# Altium PCB MS-003.24T003灯带驱动板PCB图 V1.0.PcbDoc
Units mil, origin at the board's own origin, x right, y up, seen from the top; angles counter-clockwise.
Board outline 3453.19 x 1363.84 mil, 2 copper layers (Top Layer, Bottom Layer), stack 61.756 mil thick; 42 components, 24 nets, 112 pads, 180 vias.
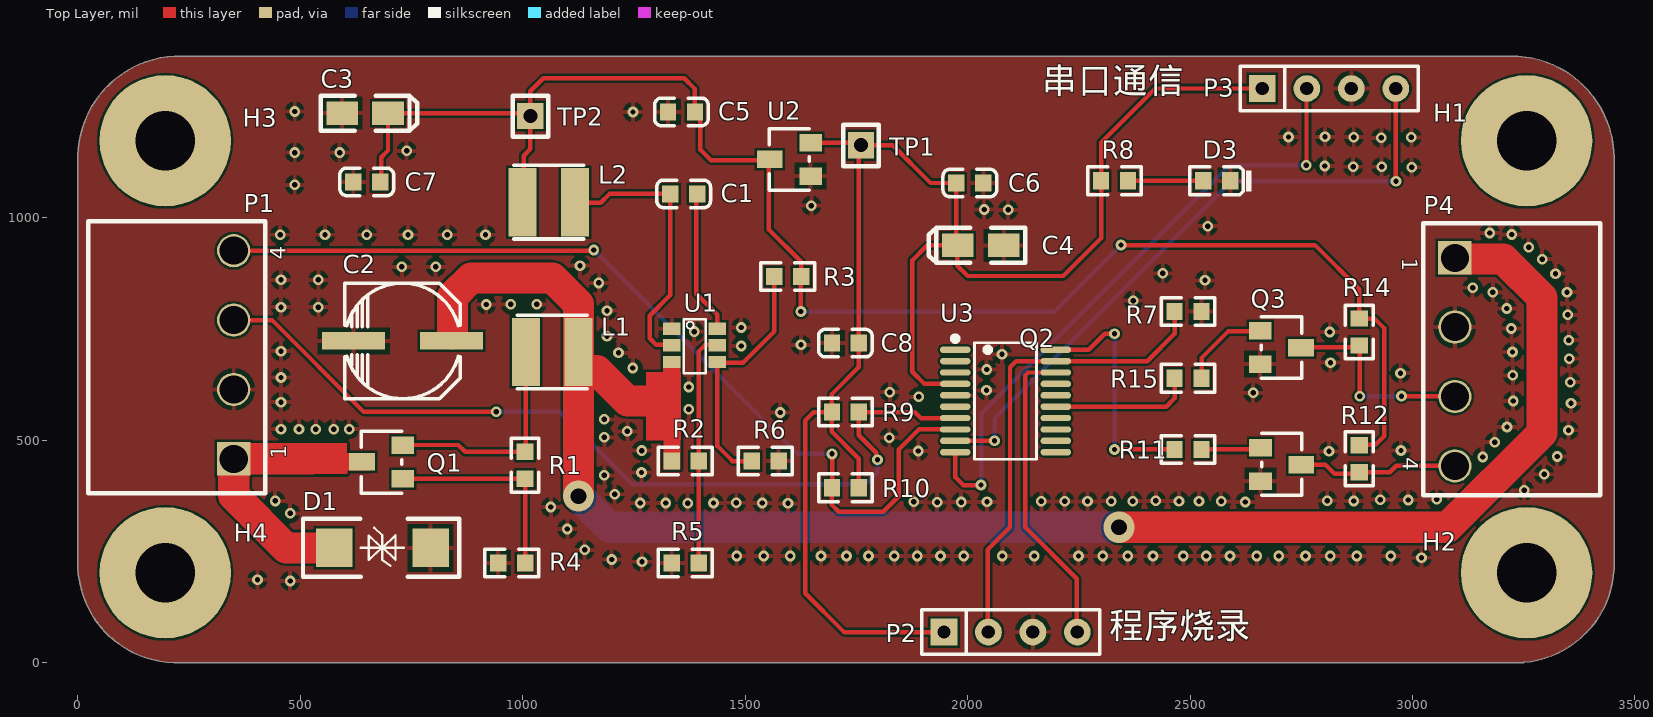
[diagram p0: Top Layer view]
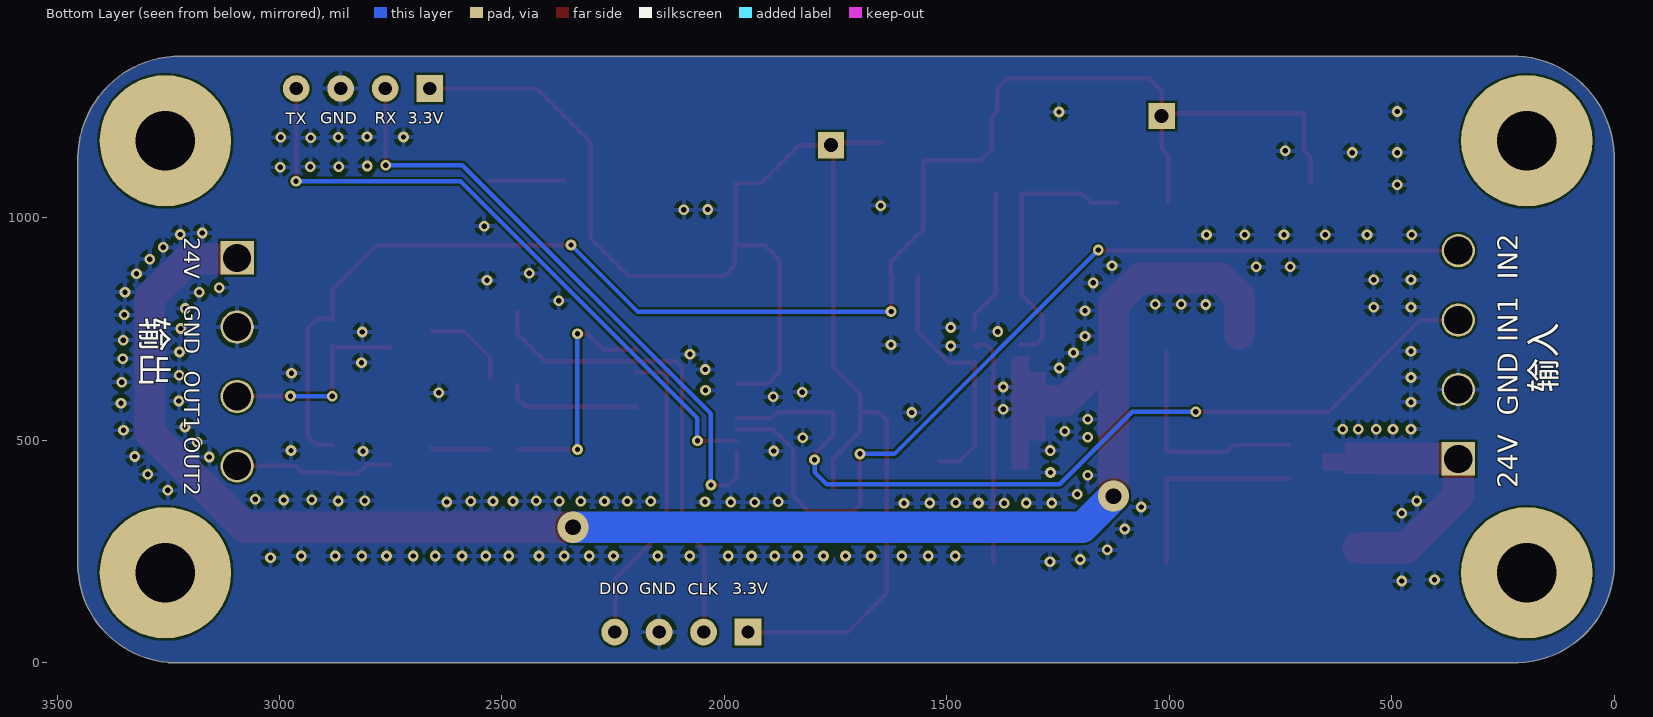
[diagram p1: Bottom Layer view, seen from below]
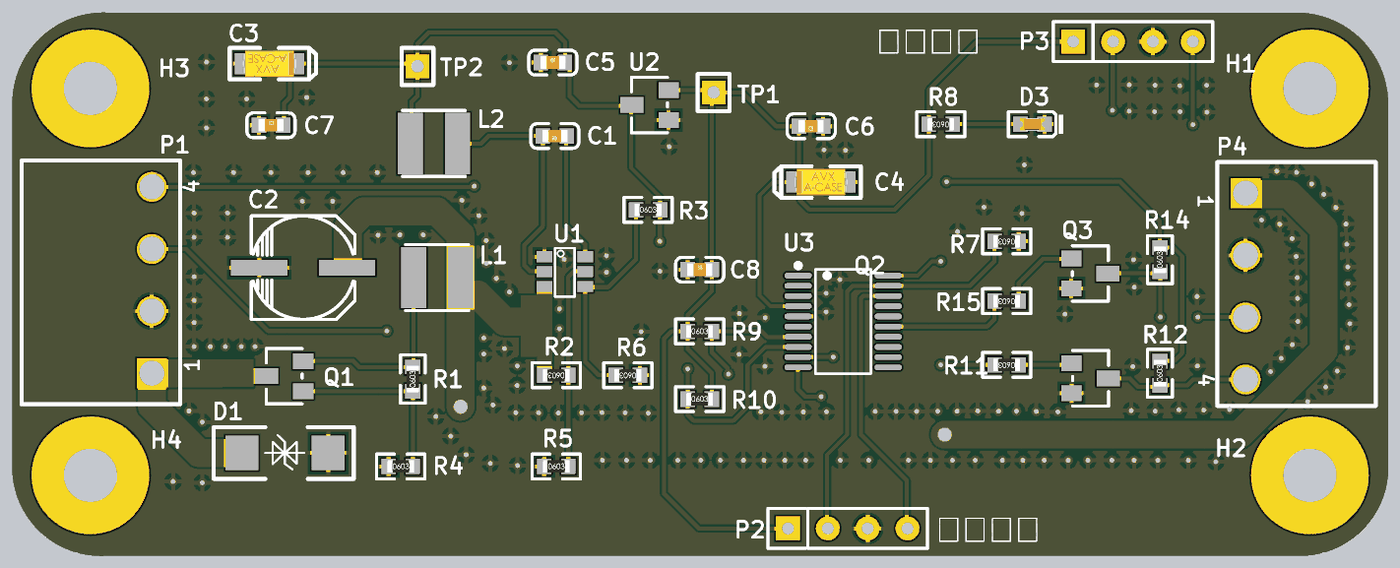
[diagram p2: 3D render of the assembled board from above, using the file's embedded part models]

## Layer stack, top to bottom
Top Solder: solder mask 1, SM-001, Dk 4
Top Layer: signal copper 1.378
Dielectric 1: core 59, Core-043, Dk 4.3
Bottom Layer: signal copper 1.378
Bottom Solder: solder mask 1, SM-001, Dk 4

## Board outline
0.06,212.91 ccw(c222.42,222.23) 231.74,-0.14 231.74,0.11 3250.21,0.11 3250.21,0.66 ccw(c3232.03,221.37) 3453.24,210.9 3453.24,1135.54 3453.18,1135.54 ccw(c3223.21,1133.58) 3221.26,1363.54 3221.26,1363.56 233.09,1363.56 233.09,1363.61 ccw(c228.45,1135.27) 0.11,1139.91

## Design rules (kind name [scope] priority, off if disabled: settings)
Clearance [All] p1: gap=5 ignorepadtopadclearanceinfootprint=FALSE
HoleSize [All] p1: absolutevalues=TRUE maxlimit=150 minlimit=1 maxpercent=80.000 minpercent=20.000
HoleToHoleClearance [All] p1: gap=5 allowstackedmicrovias=TRUE
MinimumSolderMaskSliver [All] p1: minsoldermaskwidth=1
PolygonConnect [All] p1: connectstyle=Relief reliefconductorwidth=10 reliefentries=4 polygonreliefangle="90 Angle" airgapwidth=10
RoutingVias [All] p1: holewidth=12 width=24 viastyle="Through Hole" minholewidth=12 minwidth=24 maxholewidth=80 maxwidth=120
SilkToSilkClearance [All] p1: silktosilkclearance=1
SilkToSolderMaskClearance [IsPad] p1: minsilkscreentomaskgap=1 clearancetoexposedcopper=TRUE
SolderMaskExpansion [All] p1: expansion=4 istentingtop=FALSE
Width [All] p1: maxlimit=100 minlimit=10 preferedwidth=10
25 further rules are at their usual default settings.

## Components (designator, comment, footprint, x,y, rotation, side; value= is the part's Value field where it differs from the comment)
C1 "0.1uF" 0603_C 1361.75,1053.78 r180 top
C2 "100uF/35V/20%" "CAP 6.6×6.6" 730.07,723.27 r0 top
C3 "10uF/16V" CASE-A_3216 645.49,1235.33 r0 top
C4 "10uF/16V" CASE-A_3216 2029.75,938.08 r180 top
C5 "0.1uF" 0603_C 1356.75,1238.19 r0 top
C6 "0.1uF" 0603_C 2004.99,1078.27 r180 top
C7 "0.1uF" 0603_C 649.27,1080.73 r0 top
C8 "0.1uF" 0603_C 1725.3,718.27 r0 top
D1 "SMBJ26CA" SMB 792.97,258.11 r180 top
D3 "绿灯 0603" 0603_LED_S1 2560.3,1083.27 r180 top
H1 "=Value" THC7R5D3R4-M3-PTH#1 3254.68,1173.15 r0 top
H2 "=Value" THC7R5D3R4-M3-PTH#2 3256.68,202.05 r0 top
H3 "=Value" THC7R5D3R4-M3-PTH#3 200.24,1173.15 r0 top
H4 "=Value" THC7R5D3R4-M3-PTH#2 196.24,202.05 r0 top
L1 "10uH/20%/1.5A" IND-SMD_L4.0-W4.0_FNR40XXS 1066.24,698.27 r0 top value=15uH
L2 "10uH/20%/1.5A" IND-SMD_L4.0-W4.0_FNR40XXS 1058.3,1035.1 r180 top value=15uH
P1 "Header_3.96mm" "Header 4-3.96mm" 350.3,692.22 r90 top value=W8010411120AB
P2 "Header_2.54mm" "Header 4-2.54mm" 1946.81,68.76 r0 top value=W8010411120AB
P3 "Header_2.54mm" "Header 4-2.54mm" 2662.71,1290.68 r0 top value=W8010411120AB
P4 "Header_3.96mm" "Header 4-3.96mm" 3095.3,676.31 r270 top value=W8010411120AB
Q1 "CJ2301" SOT-23_3 730.3,413.27 r90 top
Q2 "S8050" SOT-23_3 2658.49,483.27 r270 top
Q3 "S8050" SOT-23_3 2657.76,746.07 r270 top
R1 "51k" 0603_R 1005.3,443.58 r90 top
R2 "51k" 0603_R 1365.3,453.27 r180 top
R3 "51k" 0603_R 1595.62,868.27 r0 top
R4 "51k" 0603_R 974.99,224.3 r0 top
R5 "10k" 0603_R 1365.3,224.3 r0 top
R6 "6.8k" 0603_R 1544.99,453.27 r180 top
R7 "10k" 0603_R 2495.62,789.27 r180 top
R8 "10k" 0603_R 2330.3,1083.27 r180 top
R9 "4.7k" 0603_R 1725.3,563.27 r0 top
R10 "4.7k" 0603_R 1725.3,393.27 r0 top
R11 "1k" 0603_R 2495.62,479.27 r180 top
R12 "200Ω" 0603_R 2880.3,458.27 r90 top
R14 "200Ω" 0603_R 2880.3,743.27 r90 top
R15 "1k" 0603_R 2495.62,639.27 r180 top
TP1 "3.3V" TP-2.0 1760.3,1163.27 r0 top
TP2 "5V" TP-2.0 1017.07,1228.78 r0 top
U1 "TPS54202DDCR" SOT-23_6 1335.3,750.67 r270 top
U2 "ME6211A33M3G" SOT-23_3 1647.07,1093.78 r90 top
U3 "STM32G030F6P6" TSSOP-20_L6.5-W4.4-P0.65-LS6.4-BL 2085.3,588.27 r270 top

## Footprints (in the part's own frame and the unit in brackets; to place one, negate y for a bottom-side part, rotate by r counter-clockwise, add the part's x,y. Pads: shape width x height; smd on the part's side, far side on the other; paste and mask are expansions set on the pad)
0603_C [mm]
  rect 0.93x0.98 smd: 1(-0.77,0) 2(0.77,0)
  silkscreen extent -1.53,-0.79 1.54,0.79, body extent -0.8,-0.4 0.8,0.4, height 0.3
0603_LED_S1 [mm]
  rect 0.93x0.98 smd: A(0.77,0) K(-0.77,0)
  silkscreen extent -1.98,-0.79 1.54,0.79, body extent -0.8,-0.4 0.8,0.4, height 0.6
0603_R [mm]
  rect 0.93x0.98 smd: 1(-0.77,0) 2(0.77,0)
  silkscreen extent -1.53,-0.79 1.54,0.79, body extent -0.85,-0.4 0.85,0.4, height 0.56
"CAP 6.6×6.6" [mm]
  rect 3.6x1 smd: 1(-2.8,0) 2(2.8,0)
  silkscreen extent -3.3,-3.3 3.3,3.3
CASE-A_3216 [mm]
  rect 1.8x1.35 smd: 1(1.31,0) 2(-1.31,0)
  silkscreen extent -2.54,-1 2.97,1, body extent -1.7,-0.84 1.7,0.84, height 1.71
"Header 4-2.54mm" [mil]
  rect 60x60 hole 30: 1(0,0)
  round 60 hole 30: 2(100,0) 3(200,0) 4(300,0)
  silkscreen extent -50,-50 350,50
"Header 4-3.96mm" [mm]
  rect 1.9x1.9 hole 1.6: 1(-5.94,0)
  round 1.9 hole 1.6: 2(-1.98,0) 3(1.98,0) 4(5.94,0)
  silkscreen extent -7.92,-1.8 7.62,8.3
IND-SMD_L4.0-W4.0_FNR40XXS [mm]
  rect 1.6x3.9 smd: 1(-1.5,0) 2(1.5,0)
  silkscreen extent -2,-2.1 2,2.1
SMB [mm]
  rect 2.1x2.2 smd: A(0,0) K(5.5,0)
  silkscreen extent -1.63,-1.65 7.29,1.65
SOT-23_3 [mm]
  rect 1x1.29 smd: 1(0,0) 2(1.905,0)
  rect 1x1.47 smd: 3(0.965,2.332)
  silkscreen extent -0.81,0.07 2.72,2.36
SOT-23_6 [mm]
  rect 0.7x1 smd: 1(0,0) 2(0.95,0) 3(1.9,0) 4(1.9,2.6) 5(0.95,2.6) 6(0,2.6)
  silkscreen extent -0.55,0.69 2.55,1.93
THC7R5D3R4-M3-PTH#1 [mm]
  round 7.5 hole 3.4: 1(0.051,0)
THC7R5D3R4-M3-PTH#2 [mm]
  round 7.5 hole 3.4: 1(0,0)
THC7R5D3R4-M3-PTH#3 [mm]
  round 7.5 hole 3.4: 1(-0.102,0)
TP-2.0 [mm]
  rect 1.5x1.5 hole 0.8: 1(0,0)
  silkscreen extent -1.02,-1.19 1.02,1.17
TSSOP-20_L6.5-W4.4-P0.65-LS6.4-BL [mil]
  oval 14.33x68.58 smd: 1(-115.16,-113.03) 2(-89.57,-113.03) 3(-63.98,-113.03) 4(-38.39,-113.03) 5(-12.79,-113.03) 6(12.8,-113.03) 7(38.39,-113.03) 8(63.98,-113.03) 9(89.57,-113.03) 10(115.16,-113.03) 11(115.16,113.03) 12(89.57,113.03) 13(63.98,113.03) 14(38.39,113.03) 15(12.8,113.03) 16(-12.79,113.03) 17(-38.39,113.03) 18(-63.98,113.03) 19(-89.57,113.03) 20(-115.16,113.03)
  silkscreen extent -146,-119 131,70

## Part data
C1 C7 C8: library part C_2
C2: library part "Cap Pol", "Capacitor-P", LatestRevisionDate=29-May-2009, LatestRevisionNote="IPC-7351 Footprint Added.", PackageDescription="Chip Capacitor", PackageReference=C0805, Published=8-Jun-2000, Publisher="Altium Limited"
C3 C4: library part CAP_ELECTROL
C5 C6: library part Cap, "Capacitor", LatestRevisionDate=17-Jul-2002, LatestRevisionNote="Re-released for DXP Platform.", PackageDescription="Radial Cap, Thru-Hole; 2 Leads; 0.3 in Pin Spacing", PackageReference=RAD-0.3, Published=8-Jun-2000, Publisher="Altium Limited"
D1: library part SSVT
D3: library part "0603 绿灯", "发光二极管", PACKAGE=0603, SuppliersPartNumber=C72043, ComponentLink1Description=供应商链接, ComponentLink1URL=http://www.szlcsc.com/product/details_73152.html, Supplier=LC
H1 H2 H3 H4: library part M4-PTH, Allow Altenative Part=Y, Approved=YES, Categories=符号, Category=SCREW, Modify time=42779, Part Number=M4-PTH, serial number=18, Supplier 1=CRD
L1 L2: library part 101LP-00033OD.01, "SMD,电感值10uH,精度±20%,额定电流1.5A", Operating Temperature=-40°C~105°C, PACKAGE=Tape&Reel, Rated Current=2.5A, Supplier Part Number 1=SLF7055T-100M2R5-3PF, Tolerance=±20%, Allow Altenative Part=Y, Approved=YES, Categories=电感, Category=功率电感, COMPONENTLINK 1 DESCRIPTION=OpenDatasheet, COMPONENTLINK 1 URL=https://product.tdk.com/info/en/catalog/datasheets/inductor_commercial_power_slf7055_en.pdf, Modify time=2016年2月28号, MOQ=1000, Mounting Type=SurfaceMount, Part Number=101LP-00033OD.01, Pricing 1=3.619, Remark="Verified by BU1（黄雄青） check list V1.0", serial number=41, Size=7x7x5.5mm, Supplier 1=TDK
P1 P2 P3 P4: PACKAGE=Tubewithoutpad, Part Number=102NC-00002CY.01, Supplier Part Number 1=W8010411120AB, Allow Altenative Part=Y, Approved=YES, Categories=连接器, Category=VH连接器, COMPONENTLINK 1 DESCRIPTION=GetDatasheet, COMPONENTLINK 1 URL=http://www.fyconn.com/productView.asp?id=450, Modify time=2017年03月10号, Mounting Type=ThroughHole, Remark="Verified by BU4（陈雪莹） check list V2.0", serial number=545, Supplier 1=富盈源
Q1: library part P-MOS
Q2 Q3: library part NPN
R1 R2 R3 R4 R5 R6 R7 R8 R9 R10 R11 R12 R14 R15: library part "0603 10KΩ (1002) 1%", "贴片电阻", PACKAGE=0603, SuppliersPartNumber=C25804, ComponentLink1Description=供应商链接, ComponentLink1URL=http://www.szlcsc.com/product/details_26547.html, Supplier=LC
TP1 TP2: library part TP, "Test Point"
U1: library part TPS54202
U2: library part LDO-SOT23, "LDO"
U3: JLCPCB Part Class="Extended Part", Low-Voltage Detect=-, Manufacturer=ST(意法半导体), Operating Temperature Range=-40℃~+85℃, Operating Voltage Range=2V~3.6V, ADC (Bit)=12bit, Add into BOM=yes, CCP Capture/Compare=-, communication protocol=-, Convert to PCB=yes, CPU Core="ARM Cortex-M0", CPU Maximum Speed=64MHz, DAC (Bit)=-, Datasheet=https://atta.szlcsc.com/upload/public/pdf/source/20200511/C529329_A1CB615556C746C4EA827FCAD1461480.pdf, Device=STM32G030F6P6, Direct Memory Access=-, EEPROM=-, GPIO Ports Number=18, Infrared Data Association=-, Internal Comparator=-, Internal Oscillator=有, LCSC Part Name=STM32G030F6P6, Manufacturer Part=STM32G030F6P6, Name=STM32G030F6P6, Peripheral/Function=DMA；看门狗；看门狗, Program Memory Type=FLASH, Program Storage Size=32KB, PWM (Bit)=-, RAM Size=8KB, Real-Time Clock=-, Secure Digital Input and Output=-, Supplier=LCSC, Supplier Footprint=TSSOP-20, Supplier Part=C724040, Symbol=STM32G030F6P6, Universal Serial Bus=-, Watchdog=-

## Via types
v1: diameter 24, hole 12, Top Layer to Bottom Layer, tented both sides, 178 vias
v2: diameter 70, hole 35, Top Layer to Bottom Layer, tented both sides, 2 vias

## Nets (pads, with @x,y where several pads share a name; then routed paths per layer and width w, separated by ;. In a path a pad name is that pad's centre, name@x,y a point inside that pad or via, vN(x,y) a via of type N, cw(c..) or ccw(c..) an arc to the next point about the centre after c; other vN are vias at no path point)
3.3V: C4.1 C6.2 C8.2 P2.1 P3.1 R8.2 R9.1 R10.2 TP1.1 U2.2 U3.4 | length 3646.6
  Top Layer w10: U2.2 1754.79,1168.78 TP1.1 ; R10.2 1755.62,458.13 1694.99,518.76 R9.1 ; P2.1 1722.33,68.76 1635.3,155.79 1635.3,544.27 1654.3,563.27 R9.1 ; U3.4 1902.91,626.66 1875.3,654.27 1875.3,904.27 1909.3,938.27 1971.36,938.27 C4.1@1974.67,941.58 ; P3.1 2421.72,1290.68 2299.99,1168.95 R8.2 2299.99,953.95 2215.3,869.27 2000.3,869.27 1977.04,892.53 1977.04,939.22 C4.1@1974.67,941.58 ; R9.1 1694.99,603.95 1755.62,664.58 C8.2 1755.62,1158.58 TP1.1 ; TP1.1 1831.68,1163.27 1916.68,1078.27 C6.2 C4.1@1974.67,941.58
5V: C3.1 C5.2 C7.2 L2.2 R3.2 R12.2 R14.2 TP2.1 U2.3 | length 3604.5
  Top Layer w10: C7.2 682.07,1078.25 682.07,1136.31 697.07,1151.31 C3.1 TP2.1@1010.52,1235.33 ; L2.2@1002.07,1035.1 1002.07,1139.78 1017.07,1154.78 TP2.1 1017.07,1284.78 1046.04,1313.75 1363.1,1313.75 1387.07,1289.78 C5.2 1398.77,1226.48 1398.77,1153.42 1422.41,1129.78 U2.3@1553.26,1129.78 ; U2.3@1553.49,1129.78 1553.49,973.49 1625.93,901.05 R3.2 1620.3,862.64 1625.3,857.64 v1(1625.3,789.27) ; v1(2344.87,938.83) 2780.74,938.83 2880.3,839.27 R14.2 2914.9,773.58 2936.15,752.33 2936.15,509.13 2916.48,489.46 2881.19,489.46 R12.2
  Bottom Layer w10: v1(1625.3,789.27) 2195.3,789.27 v1(2344.87,938.83)
24V: C2.2 L1.2 P4.1 R2.2 U1.3 | length 3880.8
  Top Layer w70: C2.2@842.44,738.58 842.44,823.85 883.45,864.86 1066.52,864.86 1125.3,806.07 v2(1125.3,374.27) ; L1.2@1128.81,656.49 1167.08,656.49 1235.46,588.11 1319.85,588.11 ; v2(2340.3,304.27) 3079.06,304.27 3291.36,516.57 3291.36,820.58 3204.17,907.77 3097.71,907.77 P4.1
  Bottom Layer w70: v2(1125.3,374.27) 1195.3,304.27 v2(2340.3,304.27)
GND: C2.1 C3.2 C4.2 C5.1 C6.1 C7.1 C8.1 D1.A D3.K P1.2 P2.3 P3.3 P4.2 Q2.2 Q3.2 R4.1 R5.1 R6.1 R7.1 U1.1 U2.1 U3.5
  other v1: 477,183.4 403.62,186.4 1268.13,226.86 1199.76,232.05 3020.38,235.87 1481.06,239.79 1541.65,239.79 1601.37,239.79 1670.5,239.79 1727.8,239.79 1777.21,239.79 1835.29,239.79 1886.46,239.79 1939.08,239.79 1991.29,239.79 2078.04,239.79 2149.8,239.88 2249.16,239.79 2304.12,239.79 2359.86,239.79 2416.9,239.79 2484.95,239.79 2536.15,239.79 2589.95,239.79 2650.22,239.79 2699.48,239.79 2759.75,239.79 2815.49,239.79 2875.12,239.79 2951.49,239.79 1139.17,253.69 1100.22,300.43 477.06,335.67 1063,349.77 1596.21,358.09 1263.98,359.06 1321.27,359.06 1370.69,358.53 1428.76,359.06 1538.47,359.06 1479.93,359.52 1931.5,360.29 1985.37,360.98 1878.66,361.51 2043.45,361.51 2624.36,361.35 2165.68,362.5 2218.23,362.5 2269.63,362.5 2322.77,363.07 2371.28,363.07 2475.24,363.07 2520.29,363.07 2569.96,362.5 443.53,363.61 2423.26,363.65 2808.48,364.26 2868.39,363.3 2990.33,365.67 2927.78,366.46 3054.69,367.11 1206.47,378.58 3251.26,387.26 1183.41,421.01 3296.21,423.6 1267.03,427.66 3157.94,462.38 3325.42,463.6 2812.26,475.17 1889.17,475.84 1267.67,476.74 2974.39,476.84 3184.68,495.67 1823.89,505.87 1183.41,506.52 1235.16,520.09 3350.87,522.5 456.59,525.05 496.95,525.05 534.92,525.05 574.89,525.05 609.66,525.05 3212.59,529.9 1183.41,546.88 1578.53,562.45 1373.46,569.88 3356.56,582.83 456.59,585.6 3226.47,588.11 1889.99,597.71 2641.81,606.59 1825.06,608.24 2042.31,612.25 1373.46,619.84 3354.97,630.45 456.59,640.88 3225.67,645.98 2973.16,650.79 2042.83,659.07 1247.58,662.4 2815.86,674.42 3352.33,683.28 2077.3,693.02 1215.15,696.5 3224.87,698.22 456.59,700.42 1491.41,711.71 1625.53,714.31 3351.67,724.88 1189.37,733.92 2814.07,743.15 1385.3,744.27 3222.45,751.27 1491.11,753.42 3349.33,781.93 1189.37,791.3 3212,796.29 456.59,799.28 540.55,799.28 917.94,805.01 972.89,805.57 1031.2,805.57 2372.41,813.75 3180.66,832.46 3347.35,832.78 3135.47,842.85 1171.07,853.68 2533.73,859.48 456.59,860.53 540.55,860.53 2438.73,875.19 3321.6,874.38 728.21,889.85 804.2,889.85 1128.56,892.45 3291.58,907.12 3261.21,933.54 454.65,961.91 555.62,961.91 649.48,961.91 742.2,961.91 830.4,961.91 916.34,961.91 3222.91,962.59 3173.43,965.79 2540,981.32 2091.2,1017.86 2037.36,1018.72 1648.69,1027.33 487.43,1074.17 2998.34,1113.68 2866.74,1114.81 2930.88,1114.81 2802.99,1116.36 487.43,1146.65 588.47,1146.65 738.95,1150.71 2930.08,1179.75 2997.46,1180.98 2721.42,1181.78 2803.41,1182.16 2868.12,1181.3 1247.74,1237.76 487.43,1239.06
NetC1_1: C1.1 U1.6 | length 322.7
  Top Layer w10: C1.1@1390.3,1053.78 1390.3,829.27 1437.67,781.9 U1.6
NetC1_2: C1.2 L2.1 U1.2 | length 623
  Top Layer w10: L2.1 1118.53,1033.93 1175.13,1033.93 1194.98,1053.78 C1.2 1331.44,826.31 1285.3,780.18 1285.3,729.27 1300.3,714.27 1334.3,714.27 U1.2
NetD1_K: D1.K P1.1 Q1.3 | length 537.9
  Top Layer w30: Q1.3@634.25,447.02 Q1.3
  Top Layer w70: 524.69,458.36 P1.1 350.3,375.65 467.85,258.11 D1.K
NetD3_A: D3.A R8.1 | length 169.4
  Top Layer w10: R8.1 D3.A
NetL1_1: L1.1 Q1.2 R1.2 | length 506.9
  Top Layer w10: Q1.2 731.31,489.27 855.3,489.27 870.67,473.9 R1.2 1007.18,475.78 L1.1
NetQ1_1: Q1.1 R1.1 R4.2 | length 464
  Top Layer w10: Q1.1 R1.1 R4.2
NetQ2_1: Q2.1 R11.1 | length 134.2
  Top Layer w10: R11.1 2654.49,479.27 Q2.1
NetQ3_1: Q3.1 R15.1 | length 202.8
  Top Layer w10: R15.1 2525.93,684.9 2586.44,745.4 2657.09,745.4 Q3.1
NetR2_1: R2.1 R5.2 U1.5 | length 525.3
  Top Layer w10: R5.2 R2.1 1395.62,688.95 1395.3,689.27 1395.3,699.27 1410.3,714.27 U1.5@1433.67,714.27 ; U1.5@1433.67,709.27 U1.5
NetR3_1: R3.1 R6.2 U1.4 | length 561.2
  Top Layer w10: R6.2 1471.3,453.27 1437.67,486.9 U1.4 1439.26,674.27 1495.3,674.27 1565.3,744.27 R3.1
NetR11_2: R11.2 U3.20 | length 541.8
  Top Layer w10: U3.20 2272.46,703.43 2308.3,739.27 v1(2330.3,739.27) ; v1(2330.3,479.27) R11.2
  Bottom Layer w10: v1(2330.3,479.27) v1(2330.3,739.27)
NetR15_2: R15.2 U3.15 | length 304.8
  Top Layer w10: U3.15 2446.5,575.47 2465.3,594.27 R15.2@2465.3,624.27
PIN1: P1.3 R9.2 U3.7 | length 1986
  Top Layer w10: P1.3 436.32,770.17 642.23,564.27 v1(940.3,564.27) ; v1(1797.32,456.28) 1794.73,458.88 1794.73,471.87 1755.62,510.98 R9.2 1881.3,563.27 1895.3,549.27 1971.66,549.27 U3.7
  Bottom Layer w10: v1(940.3,564.27) 1082.92,564.27 1245.92,401.27 1770.4,401.27 1797.32,428.2 v1(1797.32,456.28)
PIN2: P1.4 R10.1 U3.8 | length 2072.1
  Top Layer w10: P1.4 1157.79,926.08 v1(1159.41,927.69) ; v1(1695.3,469.27) 1695.3,393.58 R10.1 1694.99,354.58 1710.3,339.27 1810.3,339.27 1845.3,374.27 1845.3,479.27 1890.32,524.29 U3.8
  Bottom Layer w10: v1(1159.41,927.69) 1617.83,469.27 v1(1695.3,469.27)
POUT1: P4.3 Q3.3 R14.1 | length 461.6
  Top Layer w10: Q3.3 2750.77,709.27 2876.62,709.27 R14.1 2881.32,711.93 2881.32,709.27 v1(2881.32,599.01) ; v1(2975.3,599.27) 3094.4,599.27 P4.3
  Bottom Layer w10: v1(2881.32,599.01) 2975.05,599.01 v1(2975.3,599.27)
POUT2: P4.4 Q2.3 R12.1 | length 361.2
  Top Layer w10: Q2.3 2804.3,445.27 2825.3,424.27 2876.62,424.27 R12.1 2948.99,427.95 2963.49,442.45 P4.4
SWCLK: P2.2 R7.2 U3.19 | length 1067.3
  Top Layer w10: P2.2@2045.3,68.76 2045.3,254.27 2095.3,304.27 2095.3,664.27 2108.87,677.84 U3.19 2403.87,677.84 2465.3,739.27 R7.2
SWDIO: P2.4 U3.18 | length 696.2
  Top Layer w10: U3.18 2135.8,652.25 2129.95,646.39 2129.95,304.27 2245.3,188.91 P2.4@2245.3,68.76
USART1_RX: P3.2 U3.10 | length 1417.6
  Top Layer w10: U3.10 1972.27,417.3 1990.3,399.27 v1(2030.3,399.27) ; v1(2761.02,1118.11) 2761.87,1118.96 2761.87,1287.83 P3.2@2764.72,1290.68
  Bottom Layer w10: v1(2030.3,399.27) 2030.3,559.27 2589.15,1118.11 v1(2761.02,1118.11)
USART1_TX: P3.4 U3.9 | length 1471
  Top Layer w10: U3.9 1972.56,498.98 v1(2060.59,498.98) ; P3.4 2962.9,1290.49 2962.9,1082.36 v1(2963.1,1082.17) v1@2963.26,1082.34
  Bottom Layer w10: v1(2060.59,498.98) 2060.59,549.55 2593.21,1082.17 v1(2963.1,1082.17)
pads on no net: H1.1 H2.1 H3.1 H4.1 U3.1 U3.2 U3.3 U3.6 U3.11 U3.12 U3.13 U3.14 U3.16 U3.17

## Polygon pours and split planes (outlines as drawn)
GND on Top Layer "GND_L01_P000" (solid, pour order 0): 0.06,212.91 ccw(c222.42,222.23) 231.74,-0.14 231.74,0.11 3250.21,0.11 3250.21,0.66 ccw(c3232.03,221.37) 3453.24,210.9 3453.24,1135.54 3453.18,1135.54 ccw(c3223.21,1133.58) 3221.26,1363.54 3221.26,1363.56 233.09,1363.56 233.09,1363.61 ccw(c228.45,1135.27) 0.11,1139.91
GND on Bottom Layer "GND_L02_P001" (solid, pour order 1): 0.06,212.91 ccw(c222.42,222.23) 231.74,-0.14 231.74,0.11 3250.21,0.11 3250.21,0.66 ccw(c3232.03,221.37) 3453.24,210.9 3453.24,1135.54 3453.18,1135.54 ccw(c3223.21,1133.58) 3221.26,1363.54 3221.26,1363.56 233.09,1363.56 233.09,1363.61 ccw(c228.45,1135.27) 0.11,1139.91

## Other copper
Top Layer:
  rectangle net 24V: 1276.56,498.99 1355.57,653.42
  rectangle net 24V: 1315.6,551.9 1354.85,689.6
  rectangle net 24V: 1316.78,434.17 1354.85,625.07
  rectangle net NetD1_K: 489.42,423.68 605.61,466.46
  rectangle net NetD1_K: 489.42,451.25 605.38,493.27
  rectangle net NetD1_K: 489.42,431.53 656.66,471.08

## Silkscreen, mask and mechanical layers (free items; w line width, h text height)
Top Overlay:
  text "串口通信" at 2166.94,1260.49 h100
  text "程序烧录" at 2317.01,35.41 h100
Bottom Overlay:
  text "3.3V" at 2711.31,1202.35 h45
  text "GND" at 2908.57,1202.35 h45
  text "RX" at 2785.7,1202.03 h45
  text "TX" at 2986.43,1201.85 h45
  text "24V" at 3214.16,956.82 h35 r90
  text "IN2" at 216.3,860.27 h45 r270
  text "GND" at 3214.16,803.31 h35 r90
  text "输出" at 3327.3,777.62 h100 r90
  text "IN1" at 216.3,720.26 h45 r270
  text "OUT1" at 3214.16,656.24 h35 r90
  text "输入" at 112.26,605.66 h100 r270
  text "GND" at 216.3,555.27 h45 r270
  text "OUT2" at 3214.16,508.36 h35 r90
  text "24V" at 216.3,392.45 h45 r270
  text "3.3V" at 1981.81,144.26 h45
  text "CLK" at 2082.28,143.89 h45
  text "GND" at 2191.81,144.26 h45
  text "DIO" at 2281.81,144.26 h45
Mechanical 1:
  lines w10: 0.06,212.91 ccw(c222.42,222.23) 231.74,-0.14 ; 0.11,212.91 0.11,1139.91 cw(c228.45,1135.27) 233.09,1363.61 ; 231.74,0.11 3250.21,0.11 ; 233.09,1363.56 3221.26,1363.56 cw(c3223.21,1133.58) 3453.18,1135.54 ; 3250.21,0.66 ccw(c3232.03,221.37) 3453.24,210.9 3453.24,1135.54

## Text inside footprints (layer, text, board x,y; h text height)
P1: Top Overlay "1" at 468.3,458.22 h35.43 r90; Top Overlay "4" at 467.3,906.22 h35.43 r90
P4: Top Overlay "1" at 2977.3,910.31 h35.43 r270; Top Overlay "4" at 2978.3,462.31 h35.43 r270